# Altium PCB comms temp.PcbDoc
Units mil, origin at the board's own origin, x right, y up, seen from the top; angles counter-clockwise.
Board outline 6000 x 4000 mil, 2 copper layers (Top Layer, Bottom Layer); 104 components, 658 nets, 470 pads, 0 vias.
Unrouted connection lines stored in the file: 208.
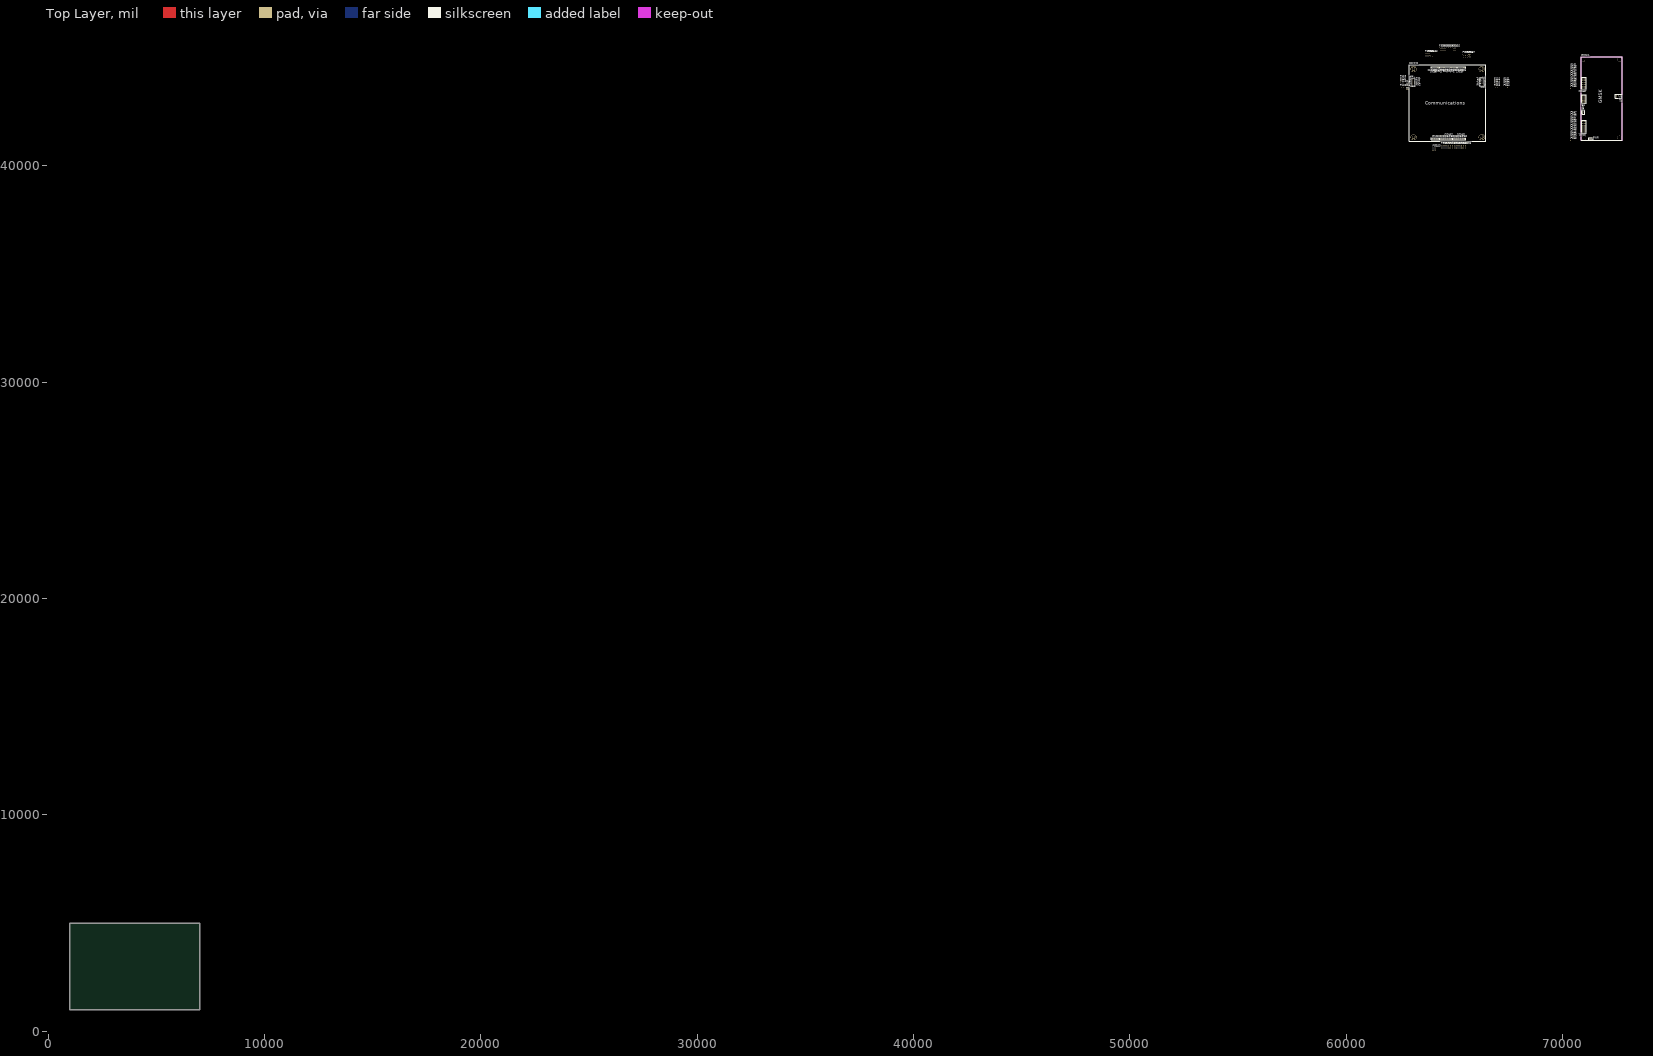
[diagram p0: Top Layer view]
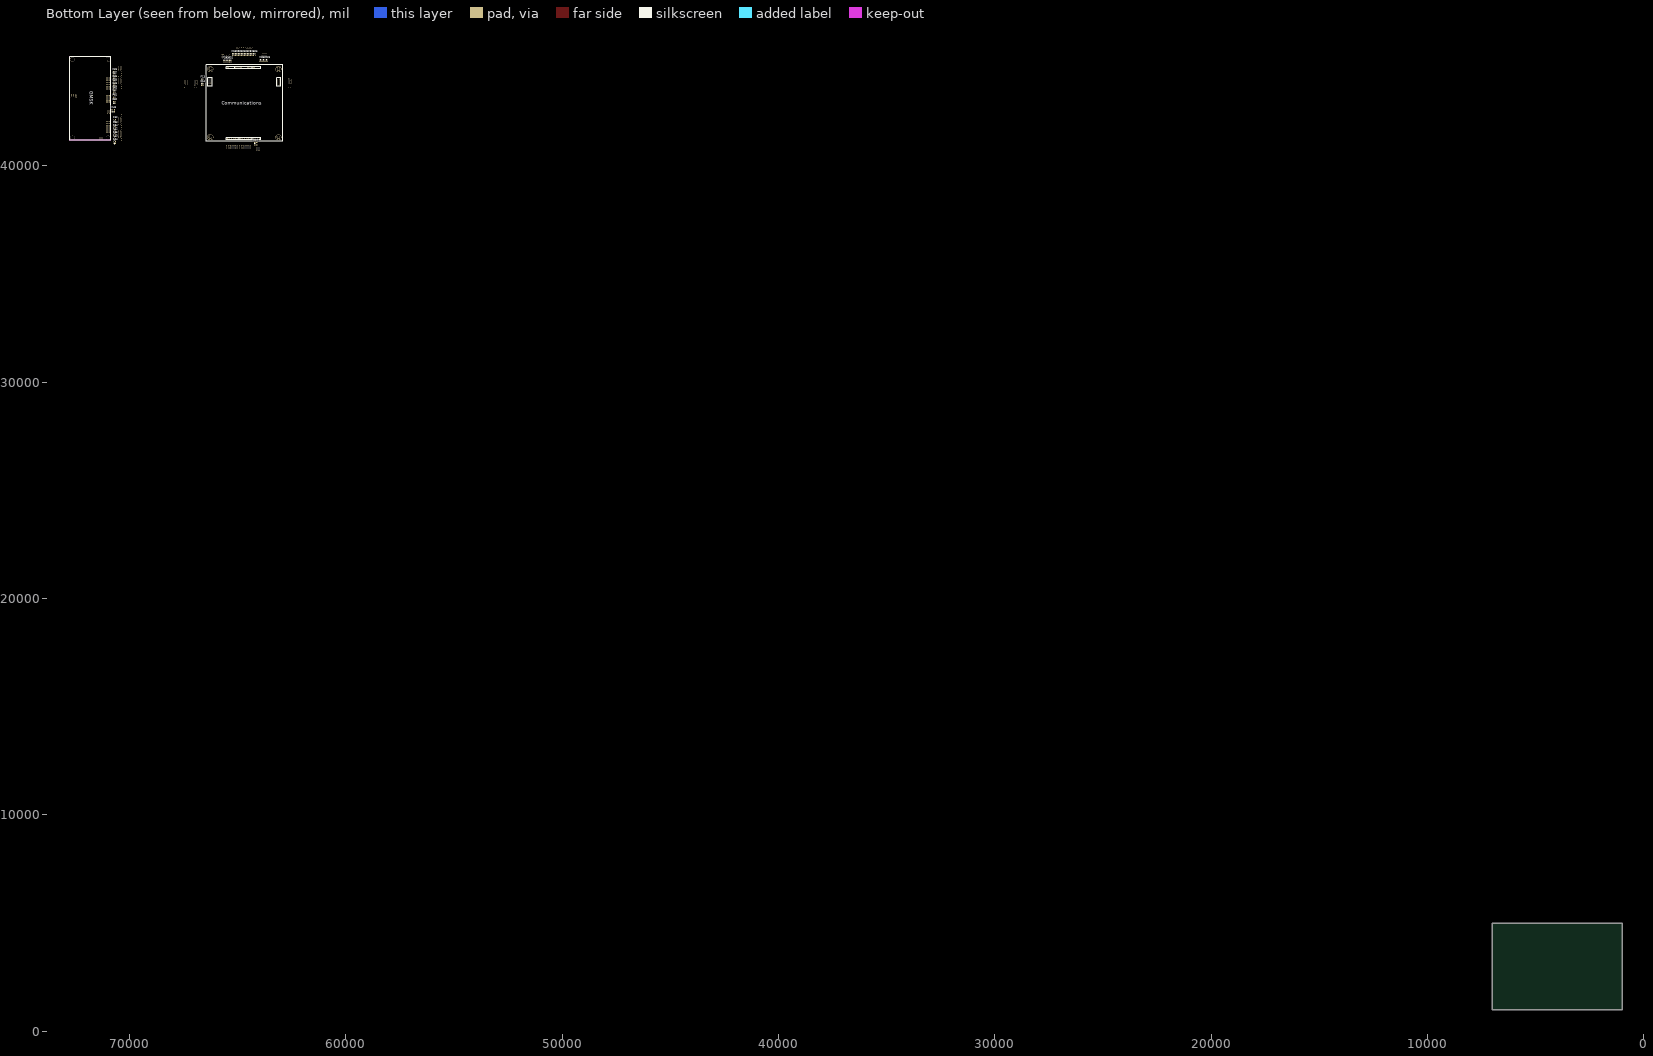
[diagram p1: Bottom Layer view, seen from below]

## Layer stack, top to bottom
Top Layer: signal copper 1.4
Dielectric: dielectric 12.6, FR-4, Dk 4.8
Bottom Layer: signal copper 1.4

## Board outline
1000,1000 7000,1000 7000,5000 1000,5000

## Design rules (kind name [scope] priority, off if disabled: settings)
Clearance [All] p1: gap=10
PolygonConnect [All] p1: connectstyle=Relief reliefconductorwidth=10 reliefentries=4 polygonreliefangle="90 Angle"
RoomDefinition COMMS [InComponentClass('COMMS')] p1: confinementstyle=ConfineIn formatcopy=TRUE lockcomponents=FALSE outline 3860,5170 35820,5170 35820,24895 3860,24895
RoutingVias [All] p1: holewidth=28 width=50 viastyle="Through Hole" minholewidth=28 minwidth=50 maxholewidth=28 maxwidth=50
SilkscreenOverComponentPads [All] p1: minsilkscreentomaskgap=10
SolderMaskExpansion [All] p1: expansion=4
Width [All] p1: maxlimit=10 minlimit=10 preferedwidth=10
27 further rules are at their usual default settings.

## Classes and differential pairs
component class CONNECTORS: F49 F50 F51 F52 F53 F54 F55 F56 F57 F58 F59 F60 F61 F62 J1 J2 J3 J4 J5 J6 J7 J8 J9 J10 J11 J12 J13 J14 J15 J16 J17 J18 J19 J20 J21 J22 J23 J24 P169 P170 P171 P172 P173 P174 P175 P176 P177 P178 P179 P180 P181 P182 P183 P184 P185 P186
component class PWR_GEN: BCR1 D1 F86 F87 F88 F89 F90 F91 F92 F93 F94 F95 F96 F97 F98 F99 F100 F101 F102 F103 F104 F105 P321 P322 P323 P324 P325 P326 P327 P328 P329 P330 P331 P332 P333 P334 P335 P336 P337 P338 P339 P340 P341 P342 P343 P344 P345 P346 P347 P348 P349 P350 P351 P352 P353 P354 P355
component class PWR_REG: F106 F107 F108 F109 F110 F111 F112 F113 F114 F115 F116 F117 F118 F119 F120 F121 F122 F123 F124 F125 F126 F127 J25 J26 J27 J28 J29 J30 J31 J32 LDO1 LDO2 P356 P357 P358 P359 P360 P361 P362 P363 P364 P365 P366 P367 P368 P369 P370 P371 P372 P373 P374 P375 P376 P377 P378 P379 P380 P381 P382 P383 P384 P385 P386 P387 P388 P389 P390 P391 P392 P393 P394 P395 P396 P397 P398 P399 P400 P401 P402 P403 P404 P405 P406 P407 P408 P409 P410 P411 SW1 SW2 TRX1 TRX2

## Components (designator, comment, footprint, x,y, rotation, side; value= is the part's Value field where it differs from the comment)
COMMS "COMMS" Communications 62920,41125 r0 top
F13 "Filter" Filter 66640,43925 r180 bottom
F14 "Filter" Filter 66640,43725 r180 bottom
F15 "Filter" Filter 62820,43725 r0 top
F16 "Filter" Filter 62820,43525 r0 top
F17 "FilterPwr" FILTERPWR 64120,41025 r90 bottom
F18 "Filter" Filter 65210,45110 r180 bottom
F19 "Filter" Filter 65070,45110 r180 bottom
F20 "Filter" Filter 64930,45110 r180 bottom
F21 "Filter" Filter 64790,45110 r180 bottom
F22 "Filter" Filter 64650,45110 r180 bottom
F23 "Filter" Filter 64510,45110 r180 bottom
F24 "Filter" Filter 64370,45110 r180 bottom
F25 "Filter" Filter 64230,45110 r180 bottom
F26 "Filter" Filter 63930,44820 r180 bottom
F27 "Filter" Filter 63790,44820 r180 bottom
F28 "Filter" Filter 63650,44820 r180 bottom
F29 "Filter" Filter 65630,44805 r180 bottom
F30 "Filter" Filter 65490,44805 r180 bottom
F31 "Filter" Filter 65350,44805 r180 bottom
F32 "Filter" Filter 70690,42130 r0 bottom
F33 "Filter" Filter 70690,41910 r0 bottom
F34 "Filter" Filter 70690,41750 r0 bottom
F35 "Filter" Filter 70690,41430 r0 bottom
F36 "Filter" Filter 70710,44350 r0 bottom
F37 "Filter" Filter 70710,44190 r0 bottom
F38 "Filter" Filter 70710,43870 r0 bottom
F39 "Filter" Filter 70710,43550 r0 bottom
F40 "Filter" Filter 70710,42970 r0 bottom
F41 "Filter" Filter 70710,43170 r0 bottom
F42 "Filter" Filter 70690,41590 r0 bottom
F43 "Filter" Filter 70690,41270 r0 bottom
F44 "Filter" Filter 70690,41110 r0 bottom
F45 "Filter" Filter 70710,44030 r0 bottom
F46 "Filter" Filter 70710,43710 r0 bottom
F47 "Filter" Filter 70710,43390 r0 bottom
F48 "FilterPwr" FILTERPWR 70750,42590 r0 bottom
GMSK1 "GMSK" GMSK 72795,41180 r90 top
P103 "Jumper" Jumper 65020,40825 r90 top
P104 "Jumper" Jumper 65120,40825 r90 top
P105 "Jumper" Jumper 65220,40825 r90 top
P106 "Jumper" Jumper 65320,40825 r90 top
P107 "Jumper" Jumper 65420,40925 r270 top
P108 "Jumper" Jumper 65520,40825 r90 top
P109 "Jumper" Jumper 64420,40825 r90 top
P110 "Jumper" Jumper 64520,40825 r90 top
P111 "Jumper" Jumper 64620,40825 r90 top
P112 "Jumper" Jumper 64720,40825 r90 top
P113 "Jumper" Jumper 64820,40825 r90 top
P114 "Jumper" Jumper 64920,40825 r90 top
P115 "Jumper" Jumper 66965,43925 r180 top
P116 "Jumper" Jumper 66965,43725 r180 top
P117 "Jumper" Jumper 66965,43825 r180 top
P118 "Jumper" Jumper 66965,43625 r180 top
P119 "Jumper" Jumper 62520,44025 r0 top
P120 "Jumper" Jumper 62520,43925 r0 top
P121 "Jumper" Jumper 62520,43825 r0 top
P122 "Jumper" Jumper 62520,43625 r0 top
P123 "Jumper" Jumper 64120,40725 r90 top
P124 "Jumper" Jumper 64020,40725 r90 top
P125 "Jumper" Jumper 65030,45330 r90 top
P126 "Jumper" Jumper 64930,45330 r90 top
P127 "Jumper" Jumper 64830,45330 r90 top
P128 "Jumper" Jumper 64730,45330 r90 top
P129 "Jumper" Jumper 64630,45330 r90 top
P130 "Jumper" Jumper 64530,45330 r90 top
P131 "Jumper" Jumper 64430,45330 r90 top
P132 "Jumper" Jumper 64330,45330 r90 top
P133 "Jumper" Jumper 63990,45090 r90 top
P134 "Jumper" Jumper 63890,45090 r90 top
P135 "Jumper" Jumper 63790,45090 r90 top
P136 "Jumper" Jumper 63690,45090 r90 top
P137 "Jumper" Jumper 65720,45040 r90 top
P138 "Jumper" Jumper 65620,45040 r90 top
P139 "Jumper" Jumper 65520,45040 r90 top
P140 "Jumper" Jumper 65420,45040 r90 top
P141 "Jumper" Jumper 70410,42070 r0 top
P142 "Jumper" Jumper 70410,41870 r0 top
P143 "Jumper" Jumper 70410,41770 r0 top
P144 "Jumper" Jumper 70410,41670 r0 top
P145 "Jumper" Jumper 70410,41470 r0 top
P146 "Jumper" Jumper 70410,44470 r0 top
P147 "Jumper" Jumper 70410,44270 r0 top
P148 "Jumper" Jumper 70410,44070 r0 top
P149 "Jumper" Jumper 70410,43870 r0 top
P150 "Jumper" Jumper 70410,43670 r0 top
P151 "Jumper" Jumper 67320,43925 r0 top
P152 "Jumper" Jumper 67320,43825 r0 top
P153 "Jumper" Jumper 67320,43725 r0 top
P154 "Jumper" Jumper 67320,43625 r0 top
P155 "Jumper" Jumper 70510,42270 r180 top
P156 "Jumper" Jumper 70510,41970 r180 top
P157 "Jumper" Jumper 70510,42170 r180 top
P158 "Jumper" Jumper 70510,41570 r180 top
P159 "Jumper" Jumper 70510,41370 r180 top
P160 "Jumper" Jumper 70510,41270 r180 top
P161 "Jumper" Jumper 70510,44570 r180 top
P162 "Jumper" Jumper 70510,44370 r180 top
P163 "Jumper" Jumper 70510,44170 r180 top
P164 "Jumper" Jumper 70510,43970 r180 top
P165 "Jumper" Jumper 70510,43770 r180 top
P166 "Jumper" Jumper 70510,43570 r180 top
P167 "Jumper" Jumper 70510,42370 r180 top
P168 "Jumper" Jumper 70410,41170 r0 top

## Footprints (in the part's own frame and the unit in brackets; to place one, negate y for a bottom-side part, rotate by r counter-clockwise, add the part's x,y. Pads: shape width x height; smd on the part's side, far side on the other; paste and mask are expansions set on the pad)
Communications [mm] "Communications"
  round 1.5 hole 0.9: AFSK1_M0(32.192,86.733) AFSK1_M1(29.652,86.733) AFSK1_RXD(34.732,86.733) AFSK2_M0(62.672,86.733) AFSK2_M1(60.132,86.733) AFSK2_RXD(65.212,86.733) AFSK2_TXD(57.592,86.733) DTMF1_Q1(52.512,3.113) DTMF1_Q2(55.052,3.113) DTMF1_Q3(57.592,3.113) DTMF1_Q4(60.132,3.113) DTMF1_ST(62.672,3.113) DTMF2_ES(49.972,3.113) DTMF2_Q1(37.272,3.113) DTMF2_Q2(39.812,3.113) DTMF2_Q3(42.352,3.113) DTMF2_Q4(44.892,3.113) DTMF2_ST(47.432,3.113) GMSK_RX1(83.952,70.923) GMSK_RX2(83.952,65.843) GMSK_TX2(83.952,68.383) GND(3.462,66.013) GND(3.462,68.553) GND(3.462,71.093) GND(3.462,73.633) GND(27.112,3.113) GND(29.652,3.113) GND(86.492,65.843) GND(86.492,68.383) GND(86.492,70.923) GND(86.492,73.463) RX1(6.002,68.553) S0(55.052,86.733) S1(52.512,86.733) S2(49.972,86.733) S3(47.432,86.733) S4(44.892,86.733) S5(42.352,86.733) S6(39.812,86.733) S7(37.272,86.733) TX1(6.002,73.633) TX2(6.002,71.093) VCC(32.192,3.113) VCC(34.732,3.113)
  rect 1.5x1.5 hole 0.9: AFSK1_TXD(27.112,86.733) DTMF1_ES(65.212,3.113) GMSK_TX1(83.952,73.463) RX2(6.002,66.013)
  round 1 hole 0.3: GND(2.377,5.013) GND(2.377,85.013) GND(2.729,3.701) GND(2.729,6.325) GND(2.729,83.701) GND(2.729,86.325) GND(3.69,7.286) GND(3.69,87.286) GND(3.69,2.74) GND(3.69,82.74) GND(5.002,2.388) GND(5.002,7.638) GND(5.002,82.388) GND(5.002,87.638) GND(6.314,2.74) GND(6.314,7.286) GND(6.314,82.74) GND(6.314,87.286) GND(7.275,3.701) GND(7.275,83.701) GND(7.275,6.325) GND(7.275,86.325) GND(7.627,5.013) GND(7.627,85.013) GND(82.375,85) GND(82.377,5.013) GND(82.727,83.688) GND(82.727,86.312) GND(82.729,3.701) GND(82.729,6.325) GND(83.688,87.273) GND(83.688,82.727) GND(83.69,7.286) GND(83.69,2.74) GND(85,82.375) GND(85,87.625) GND(85.002,2.388) GND(85.002,7.638) GND(86.312,82.727) GND(86.312,87.273) GND(86.314,2.74) GND(86.314,7.286) GND(87.273,83.688) GND(87.273,86.312) GND(87.275,3.701) GND(87.275,6.325) GND(87.625,85) GND(87.627,5.013)
  round 7 hole 3.5: GND(5.002,5.013) GND(5.002,85.013) GND(85,85) GND(85.002,5.013)
  silkscreen extent 0,0.01 90,90.01
Filter [mm]
  rect 1x1.4 smd: 1(-1,2) 2(1,0) 2(1,2) 3(-1,0)
  silkscreen extent 0,1.35 0,2.65, body extent -1.1,-0.65 1.1,2.65, height 0.5
FILTERPWR [mm]
  rect 1.15x1.7 smd: 1(-1.425,2.35) 2(1.425,0) 2(1.425,2.35) 3(-1.425,0)
  silkscreen extent 0,1.7 0,3, body extent -1.63,-0.82 1.62,3.17, height 0.7
GMSK [mm] "Foot print of GMSK for the flatsat board"
  rect 1.5x2.1 hole 1: 1A(22.15,47.03) 1B(73.05,47.08) 1C(44.59,44.54) 2C(31.77,46.29)
  rect 2.1x1.5 hole 1: 1C(50.53,7.82) 8C(1.97,36.2)
  oval 1.5x2.1 hole 1: 2A(22.15,44.49) 2B(73.05,44.54) 3A(19.61,47.03) 3B(70.51,47.08) 3C(47.13,44.54) 4A(19.61,44.49) 4B(70.51,44.54) 5A(17.07,47.03) 5B(67.97,47.08) 5C(49.67,44.54) 6A(17.07,44.49) 6B(67.97,44.54) 7A(14.53,47.03) 7B(65.43,47.08) 7C(52.21,44.54) 8A(14.53,44.49) 8B(65.43,44.54) 8C(44.59,47.08) 8C(47.13,47.08) 8C(49.67,47.08) 8C(52.21,47.08) 8C(60.35,47.08) 9A(11.99,47.03) 9B(62.89,47.08) 10A(11.99,44.49) 10B(62.89,44.54) 11A(9.45,47.03) 12A(9.45,44.49) 12B(60.35,44.54) ""(34.31,46.29)
  oval 2.1x1.5 hole 1: 2C(1.97,38.74) 3(50.53,5.28) 3C(50.53,2.74) 4(53.07,5.28) 5C(53.07,2.74) 7C(53.07,7.82)
  round 5 hole 3: 8C(2.97,45.74) 8C(3,4) 8C(94.97,3.74) 8C(94.97,45.74)
  round 1 hole 0.3: GND(0.97,45.74) GND(1,4) GND(1.238,46.74) GND(1.238,44.74) GND(1.268,5) GND(1.268,3) GND(1.97,47.472) GND(1.97,44.008) GND(2,5.732) GND(2,2.268) GND(2.97,47.74) GND(2.97,43.74) GND(3,6) GND(3,2) GND(3.97,44.008) GND(3.97,47.472) GND(4,2.268) GND(4,5.732) GND(4.702,44.74) GND(4.702,46.74) GND(4.732,3) GND(4.732,5) GND(4.97,45.74) GND(5,4) GND(92.97,3.74) GND(92.97,45.74) GND(93.238,2.74) GND(93.238,4.74) GND(93.238,44.74) GND(93.238,46.74) GND(93.97,2.008) GND(93.97,5.472) GND(93.97,44.008) GND(93.97,47.472) GND(94.97,1.74) GND(94.97,5.74) GND(94.97,43.74) GND(94.97,47.74) GND(95.97,2.008) GND(95.97,5.472) GND(95.97,44.008) GND(95.97,47.472) GND(96.702,2.74) GND(96.702,4.74) GND(96.702,44.74) GND(96.702,46.74) GND(96.97,3.74) GND(96.97,45.74)
  Top Layer lines w0.3: 50.53,2.74 50.03,2.24
  Keep-Out Layer lines w0.254: -0.03,48.74 97.97,48.74 97.97,0.74 -0.03,0.74 -0.03,48.74
  silkscreen extent -0.03,0.74 97.97,48.94, body extent 0.8,1.57 74.23,48.26, height 7.01
Jumper [mm] "Connector; Header; 2 Position"
  round 1.5 hole 0.9: 1(0,0) 2(2.54,0)

## Nets (pads, with @x,y where several pads share a name; then routed paths per layer and width w, separated by ;. In a path a pad name is that pad's centre, name@x,y a point inside that pad or via, vN(x,y) a via of type N, cw(c..) or ccw(c..) an arc to the next point about the centre after c; other vN are vias at no path point)
3V3_AUX: 
3V3_AUX_E\N\: 
3V3_BBONE: 
3V3_COMMS: P123.1 P167.2
3V3_CSC: 
3V3_PWR: 
3V3_UNREG: 
5V0_AUX: 
5V0_AUX_E\N\: 
5V0_BBONE: 
5V0_BCR: 
5V0_TELEM: 
5V0_UNREG: 
8V0_RX1: 
8V0_RX2: 
AFSK1_DET: P108.1
AFSK1_M0: P134.2
AFSK1_M1: P135.2
AFSK1_RX: 
AFSK1_RXD: P133.2
AFSK1_TX: 
AFSK1_TXD: P136.2
AFSK2_DET: P114.1
AFSK2_M0: P138.2
AFSK2_M1: P139.2
AFSK2_RX: 
AFSK2_RXD: P137.2
AFSK2_TX: 
AFSK2_TXD: P140.2
BBONE_E\N\: 
BBONE_I2C2_SCL: 
BBONE_I2C2_SDA: 
BCR_E\N\: 
BCR_MISO: 
BCR_MOSI: 
BCR_R\S\T\: 
BCR_SCK: 
COMMS_E\N\: 
CSC_E\N\: 
CSC_ISP: 
CSC_RST: 
DTMF1Q1: P103.1
DTMF1Q2: P104.1
DTMF1Q3: P105.1
DTMF1Q4: P106.1
DTMF1ST: P107.1
DTMF2Q1: P109.1
DTMF2Q2: P110.1
DTMF2Q3: P111.1
DTMF2Q4: P112.1
DTMF2ST: P113.1
GND: F13.3 F14.3 F15.3 F16.3 F17.3 F18.3 F19.3 F20.3 F21.3 F22.3 F23.3 F24.3 F25.3 F26.3 F27.3 F28.3 F29.3 F30.3 F31.3 F32.3 F33.3 F34.3 F35.3 F36.3 F37.3 F38.3 F39.3 F40.3 F41.3 F42.3 F43.3 F44.3 F45.3 F46.3 F47.3 F48.3 P124.1 P168.2
I2C0_SCL: 
I2C0_SDA: 
I2C1_SCL: 
I2C1_SDA: 
I2C2_SCL: 
I2C2_SCL_5V: 
I2C2_SDA: 
I2C2_SDA_5V: 
NetBBONE1_A01: 
NetBBONE1_A02: 
NetBBONE1_A03: 
NetBBONE1_A04: 
NetBBONE1_A05: 
NetBBONE1_A06: 
NetBBONE1_A07: 
NetBBONE1_A08: 
NetBBONE1_A09: 
NetBBONE1_A10: 
NetBBONE1_A11: 
NetBBONE1_A12: 
NetBBONE1_A13: 
NetBBONE1_A14: 
NetBBONE1_A15: 
NetBBONE1_A16: 
NetBBONE1_A17: 
NetBBONE1_A18: 
NetBBONE1_A19: 
NetBBONE1_A20: 
NetBBONE1_A21: 
NetBBONE1_A22: 
NetBBONE1_A23: 
NetBBONE1_A24: 
NetBBONE1_A25: 
NetBBONE1_A26: 
NetBBONE1_A27: 
NetBBONE1_A28: 
NetBBONE1_A29: 
NetBBONE1_A30: 
NetBBONE1_A31: 
NetBBONE1_A32: 
NetBBONE1_A33: 
NetBBONE1_A34: 
NetBBONE1_A35: 
NetBBONE1_A36: 
NetBBONE1_A37: 
NetBBONE1_A38: 
NetBBONE1_A39: 
NetBBONE1_A40: 
NetBBONE1_A41: 
NetBBONE1_A42: 
NetBBONE1_A43: 
NetBBONE1_A44: 
NetBBONE1_A45: 
NetBBONE1_A46: 
NetBBONE1_B01: 
NetBBONE1_B02: 
NetBBONE1_B03: 
NetBBONE1_B04: 
NetBBONE1_B05: 
NetBBONE1_B06: 
NetBBONE1_B07: 
NetBBONE1_B08: 
NetBBONE1_B09: 
NetBBONE1_B10: 
NetBBONE1_B11: 
NetBBONE1_B12: 
NetBBONE1_B13: 
NetBBONE1_B14: 
NetBBONE1_B15: 
NetBBONE1_B16: 
NetBBONE1_B17: 
NetBBONE1_B18: 
NetBBONE1_B19: 
NetBBONE1_B20: 
NetBBONE1_B21: 
NetBBONE1_B22: 
NetBBONE1_B23: 
NetBBONE1_B24: 
NetBBONE1_B25: 
NetBBONE1_B26: 
NetBBONE1_B27: 
NetBBONE1_B28: 
NetBBONE1_B29: 
NetBBONE1_B30: 
NetBBONE1_B31: 
NetBBONE1_B32: 
NetBBONE1_B33: 
NetBBONE1_B34: 
NetBBONE1_B35: 
NetBBONE1_B36: 
NetBBONE1_B37: 
NetBBONE1_B38: 
NetBBONE1_B39: 
NetBBONE1_B40: 
NetBBONE1_B41: 
NetBBONE1_B42: 
NetBBONE1_B43: 
NetBBONE1_B44: 
NetBBONE1_B45: 
NetBBONE1_B46: 
NetBBONE1_P01: 
NetBBONE1_P02: 
NetBBONE1_P03: 
NetBBONE1_P04: 
NetBBONE1_P05: 
NetBBONE1_P06: 
NetBBONE1_P07: 
NetBBONE1_P08: 
NetBBONE1_P09: 
NetBBONE1_P10: 
NetBCR1_1: 
NetBCR1_2: 
NetBCR1_3: 
NetBCR1_4: 
NetBCR1_5: 
NetBCR1_6: 
NetBCR1_7: 
NetBCR1_8: 
NetBCR1_9: 
NetBCR1_10: 
NetBCR1_11: 
NetBCR1_12: 
NetBCR1_13: 
NetBCR1_14: 
NetBCR1_15: 
NetBCR1_16: 
NetBCR1_17: 
NetBCR1_18: 
NetBCR1_19: 
NetBCR1_20: 
NetBCR1_21: 
NetBCR1_22: 
NetBCR1_23: 
NetBCR1_24: 
NetBCR1_25: 
NetBCR1_26: 
NetBCR1_27: 
NetBCR1_28: 
NetBCR1_29: 
NetBCR1_30: 
NetBCR1_31: 
NetBCR1_32: 
NetBCR1_33: 
NetBCR1_34: 
NetBCR1_35: 
NetC1_2: 
NetCOMMS_AFSK1_M0: COMMS.AFSK1_M0 F26.2
NetCOMMS_AFSK1_M1: COMMS.AFSK1_M1 F27.2
NetCOMMS_AFSK1_RXD: COMMS.AFSK1_RXD P133.1
NetCOMMS_AFSK1_TXD: COMMS.AFSK1_TXD F28.2
NetCOMMS_AFSK2_M0: COMMS.AFSK2_M0 F29.2
NetCOMMS_AFSK2_M1: COMMS.AFSK2_M1 F30.2
NetCOMMS_AFSK2_RXD: COMMS.AFSK2_RXD P137.1
NetCOMMS_AFSK2_TXD: COMMS.AFSK2_TXD F31.2
NetCOMMS_DTMF1_ES: COMMS.DTMF1_ES P108.2
NetCOMMS_DTMF1_Q1: COMMS.DTMF1_Q1 P103.2
NetCOMMS_DTMF1_Q2: COMMS.DTMF1_Q2 P104.2
NetCOMMS_DTMF1_Q3: COMMS.DTMF1_Q3 P105.2
NetCOMMS_DTMF1_Q4: COMMS.DTMF1_Q4 P106.2
NetCOMMS_DTMF1_ST: COMMS.DTMF1_ST P107.2
NetCOMMS_DTMF2_ES: COMMS.DTMF2_ES P114.2
NetCOMMS_DTMF2_Q1: COMMS.DTMF2_Q1 P109.2
NetCOMMS_DTMF2_Q2: COMMS.DTMF2_Q2 P110.2
NetCOMMS_DTMF2_Q3: COMMS.DTMF2_Q3 P111.2
NetCOMMS_DTMF2_Q4: COMMS.DTMF2_Q4 P112.2
NetCOMMS_DTMF2_ST: COMMS.DTMF2_ST P113.2
NetCOMMS_GMSK_RX1: COMMS.GMSK_RX1 P117.2
NetCOMMS_GMSK_RX2: COMMS.GMSK_RX2 P118.2
NetCOMMS_GMSK_TX1: COMMS.GMSK_TX1 F13.2
NetCOMMS_GMSK_TX2: COMMS.GMSK_TX2 F14.2
NetCOMMS_GND: COMMS.GND P124.2
NetCOMMS_RX1: COMMS.RX1 F15.2
NetCOMMS_RX2: COMMS.RX2 F16.2
NetCOMMS_S0: COMMS.S0 F18.2
NetCOMMS_S1: COMMS.S1 F19.2
NetCOMMS_S2: COMMS.S2 F20.2
NetCOMMS_S3: COMMS.S3 F21.2
NetCOMMS_S4: COMMS.S4 F22.2
NetCOMMS_S5: COMMS.S5 F23.2
NetCOMMS_S6: COMMS.S6 F24.2
NetCOMMS_S7: COMMS.S7 F25.2
NetCOMMS_TX1: COMMS.TX1 P119.2
NetCOMMS_TX2: COMMS.TX2 P120.2
NetCOMMS_VCC: COMMS.VCC F17.2
NetCSC1_C1_1: 
NetCSC1_C1_2: 
NetCSC1_C1_3: 
NetCSC1_C1_4: 
NetCSC1_C1_5: 
NetCSC1_C1_6: 
NetCSC1_C1_7: 
NetCSC1_C1_8: 
NetCSC1_C1_9: 
NetCSC1_C1_10: 
NetCSC1_C1_11: 
NetCSC1_C1_12: 
NetCSC1_C1_13: 
NetCSC1_C1_14: 
NetCSC1_C1_15: 
NetCSC1_C1_16: 
NetCSC1_C1_17: 
NetCSC1_C1_18: 
NetCSC1_C1_19: 
NetCSC1_C1_20: 
NetCSC1_C1_21: 
NetCSC1_C1_22: 
NetCSC1_C1_23: 
NetCSC1_C1_24: 
NetCSC1_C1_25: 
NetCSC1_C1_26: 
NetCSC1_C1_27: 
NetCSC1_C1_28: 
NetCSC1_C1_29: 
NetCSC1_C1_30: 
NetCSC1_C1_31: 
NetCSC1_C1_32: 
NetCSC1_C1_33: 
NetCSC1_C1_34: 
NetCSC1_C1_35: 
NetCSC1_C1_36: 
NetCSC1_C1_37: 
NetCSC1_C1_38: 
NetCSC1_C1_39: 
NetCSC1_C1_40: 
NetCSC1_C2_1: 
NetCSC1_C2_2: 
NetCSC1_C2_3: 
NetCSC1_C2_4: 
NetCSC1_C2_5: 
NetCSC1_C2_6: 
NetCSC1_C2_7: 
NetCSC1_C2_8: 
NetCSC1_C2_9: 
NetCSC1_C2_10: 
NetCSC1_C2_11: 
NetCSC1_C2_12: 
NetCSC1_C2_13: 
NetCSC1_C2_14: 
NetCSC1_C2_15: 
NetCSC1_C2_16: 
NetCSC1_C2_17: 
NetCSC1_C2_18: 
NetCSC1_C2_19: 
NetCSC1_C2_20: 
NetCSC1_C2_21: 
NetCSC1_C2_22: 
NetCSC1_C2_23: 
NetCSC1_C2_24: 
NetCSC1_C2_25: 
NetCSC1_C2_26: 
NetCSC1_C2_27: 
NetCSC1_C2_28: 
NetCSC1_C2_29: 
NetCSC1_C2_30: 
NetCSC1_C2_31: 
NetCSC1_C2_32: 
NetCSC1_C2_33: 
NetCSC1_C2_34: 
NetCSC1_C2_35: 
NetCSC1_C2_36: 
NetCSC1_C2_37: 
NetCSC1_C2_38: 
NetCSC1_C2_39: 
NetCSC1_C2_40: 
NetCSC1_C3_1: 
NetCSC1_C3_2: 
NetCSC1_C3_3: 
NetCSC1_C3_4: 
NetCSC1_C3_5: 
NetCSC1_C3_6: 
NetCSC1_C3_7: 
NetCSC1_C3_8: 
NetCSC1_C3_9: 
NetCSC1_C3_10: 
NetCSC1_C3_11: 
NetCSC1_C3_12: 
NetCSC1_C3_13: 
NetCSC1_C3_14: 
NetCSC1_C3_15: 
NetCSC1_C3_16: 
NetCSC1_C3_17: 
NetCSC1_C3_18: 
NetCSC1_C3_19: 
NetCSC1_C3_20: 
NetCSC1_C3_21: 
NetCSC1_C3_22: 
NetCSC1_C3_23: 
NetCSC1_C3_24: 
NetCSC1_C3_25: 
NetCSC1_C3_26: 
NetCSC1_C3_27: 
NetCSC1_C3_28: 
NetCSC1_C3_29: 
NetCSC1_C3_30: 
NetCSC1_C3_31: 
NetCSC1_C3_32: 
NetCSC1_C3_33: 
NetCSC1_C3_34: 
NetCSC1_C3_35: 
NetCSC1_C3_36: 
NetCSC1_C3_37: 
NetCSC1_C3_38: 
NetCSC1_C3_39: 
NetCSC1_C3_40: 
NetCSC1_GND: 
NetCSC1_ISP1: 
NetCSC1_ISP2: 
NetCSC1_ISP3: 
NetCSC1_ISP4: 
NetCSC1_ISP5: 
NetCSC1_ISP6: 
NetD1_1: 
NetF1_1: 
NetF2_1: 
NetF3_1: 
NetF4_1: 
NetF5_1: 
NetF6_1: 
NetF7_1: 
NetF8_1: 
NetF9_1: 
NetF10_1: 
NetF11_2: 
NetF12_2: 
NetF13_1: F13.1 P115.2
NetF14_1: F14.1 P116.2
NetF15_1: F15.1 P121.2
NetF16_1: F16.1 P122.2
NetF17_1: F17.1 P123.2
NetF18_1: F18.1 P125.1
NetF19_1: F19.1 P126.1
NetF20_1: F20.1 P127.1
NetF21_1: F21.1 P128.1
NetF22_1: F22.1 P129.1
NetF23_1: F23.1 P130.1
NetF24_1: F24.1 P131.1
NetF25_1: F25.1 P132.1
NetF26_1: F26.1 P134.1
NetF27_1: F27.1 P135.1
NetF28_1: F28.1 P136.1
NetF29_1: F29.1 P138.1
NetF30_1: F30.1 P139.1
NetF31_1: F31.1 P140.1
NetF32_1: F32.1 P141.2
NetF32_2: F32.2 GMSK1.1A
NetF33_1: F33.1 P143.2
NetF33_2: F33.2 GMSK1.5A
NetF34_1: F34.1 P144.2
NetF34_2: F34.2 GMSK1.7A
NetF35_1: F35.1 P145.2
NetF35_2: F35.2 GMSK1.9A
NetF36_1: F36.1 P146.2
NetF36_2: F36.2 GMSK1.1B
NetF37_1: F37.1 P148.2
NetF37_2: F37.2 GMSK1.5B
NetF38_1: F38.1 P149.2
NetF38_2: F38.2 GMSK1.7B
NetF39_1: F39.1 P150.2
NetF39_2: F39.2 GMSK1.9B
NetF40_1: F40.1 P152.2
NetF40_2: F40.2 GMSK1.3C
NetF41_1: F41.1 P154.2
NetF41_2: F41.2 GMSK1.7C
NetF42_1: F42.1 P158.1
NetF42_2: F42.2 GMSK1.8A
NetF43_1: F43.1 P159.1
NetF43_2: F43.2 GMSK1.10A
NetF44_1: F44.1 P160.1
NetF44_2: F44.2 GMSK1.12A
NetF45_1: F45.1 P164.1
NetF45_2: F45.2 GMSK1.8B
NetF46_1: F46.1 P165.1
NetF46_2: F46.2 GMSK1.10B
NetF47_1: F47.1 P166.1
NetF47_2: F47.2 GMSK1.12B
NetF48_1: F48.1 P167.1
NetF48_2: F48.2 GMSK1.2C
NetF50_2: 
NetF51_2: 
NetF52_2: 
NetF53_2: 
NetF54_2: 
NetF55_2: 
NetF56_2: 
NetF57_2: 
NetF58_2: 
NetF59_1: 
NetF60_1: 
NetF61_2: 
NetF62_2: 
NetF63_1: 
NetF64_1: 
NetF65_1: 
NetF66_1: 
NetF67_1: 
NetF68_1: 
NetF69_1: 
NetF70_1: 
NetF71_1: 
NetF72_1: 
NetF73_1: 
NetF74_1: 
NetF75_1: 
NetF76_1: 
NetF77_1: 
NetF78_1: 
NetF79_1: 
NetF80_1: 
NetF81_1: 
NetF82_1: 
NetF83_1: 
NetF84_1: 
NetF84_2: 
NetF85_1: 
NetF86_1: 
NetF87_1: 
NetF88_1: 
NetF89_1: 
NetF90_1: 
NetF91_1: 
NetF92_1: 
NetF93_1: 
NetF94_1: 
NetF95_1: 
NetF96_1: 
NetF97_1: 
NetF98_1: 
NetF99_2: 
NetF100_1: 
NetF101_1: 
NetF102_1: 
NetF103_1: 
NetF104_1: 
NetF105_1: 
NetF106_1: 
NetF106_2: 
NetF107_1: 
NetF107_2: 
NetF108_1: 
NetF108_2: 
NetF109_1: 
NetF109_2: 
NetF110_1: 
NetF110_2: 
NetF111_1: 
NetF111_2: 
NetF112_1: 
NetF112_2: 
NetF113_1: 
NetF113_2: 
NetF114_1: 
NetF114_2: 
NetF115_1: 
NetF115_2: 
NetF116_1: 
NetF116_2: 
NetF117_1: 
NetF117_2: 
NetF118_1: 
NetF118_2: 
NetF119_1: 
NetF119_2: 
NetF120_1: 
NetF120_2: 
NetF121_1: 
NetF121_2: 
NetF122_1: 
NetF122_2: 
NetF123_1: 
NetF123_2: 
NetF124_1: 
NetF124_2: 
NetF125_1: 
NetF125_2: 
NetF126_1: 
NetF126_2: 
NetF127_1: 
NetF127_2: 
NetGMSK1_1C: GMSK1.1C P151.2
NetGMSK1_2A: GMSK1.2A P155.1
NetGMSK1_2B: GMSK1.2B P161.1
NetGMSK1_3A: GMSK1.3A P142.2
NetGMSK1_3B: GMSK1.3B P147.2
NetGMSK1_4A: GMSK1.4A P156.1
NetGMSK1_4B: GMSK1.4B P162.1
NetGMSK1_5C: GMSK1.5C P153.2
NetGMSK1_6A: GMSK1.6A P157.1
NetGMSK1_6B: GMSK1.6B P163.1
NetGMSK1_8C: GMSK1.8C P168.1
NetJ15_1: 
NetJ15_2: 
NetJ15_3: 
NetJ15_4: 
NetJ15_5: 
NetJ15_6: 
NetJ15_7: 
NetJ15_8: 
NetJ15_9: 
NetJ16_1: 
NetJ16_2: 
NetJ16_3: 
NetJ16_4: 
NetJ16_5: 
NetJ16_6: 
NetJ16_7: 
NetJ16_8: 
NetJ16_9: 
NetJ25_2: 
NetJ26_2: 
NetLDO1_EN1: 
NetLDO1_EN2: 
NetLDO1_EN3: 
NetLDO1_EN4: 
NetLDO1_GND: 
NetLDO1_RST1: 
NetLDO1_RST2: 
NetLDO1_RST3: 
NetLDO1_RST4: 
NetLDO2_EN1: 
NetLDO2_EN2: 
NetLDO2_EN3: 
NetLDO2_EN4: 
NetLDO2_GND: 
NetLDO2_RST1: 
NetLDO2_RST2: 
NetLDO2_RST3: 
NetLDO2_RST4: 
NetP275_2: 
NetP276_2: 
NetP297_1: 
NetP298_1: 
NetP299_1: 
NetP300_1: 
NetP358_2: 
NetP359_2: 
NetP362_2: 
NetP363_2: 
NetP365_2: 
NetP366_2: 
NetP368_2: 
NetP369_2: 
NetP372_1: 
NetP375_1: 
NetP377_1: 
NetP378_1: 
NetP380_1: 
NetP381_1: 
PLLACQ1: P160.2
PLLACQ2: P166.2
PWR_E\N\: 
RX1_AF: P121.1
RX1_GMSK: P117.1 P152.1
RX2_AF: P122.1
RX2_GMSK: P118.1 P154.1
RX_PSAVE1: P144.1
RX_PSAVE2: P149.1
RX_S/N1: P157.2
RX_S/N2: P163.2
RXACQ1: P145.1
RXACQ2: P150.1
RXCLK1: P156.2
RXCLK2: P162.2
RXDATA1: P142.1
RXDATA2: P147.1
RXHOLD1: P159.2
RXHOLD2: P165.2
S0: P125.2
S1: P126.2
S2: P127.2
S3: P128.2
S4: P129.2
S5: P130.2
S6: P131.2
S7: P132.2
SOLA_X+_T: 
SOLA_X+_V: 
SOLA_X-_T: 
SOLA_X-_V: 
SOLA_Y+_T: 
SOLA_Y+_V: 
SOLA_Y-_T: 
SOLA_Y-_V: 
SOLA_Z+_T: 
SOLA_Z+_V: 
SOLA_Z-_T: 
SOLA_Z-_V: 
TBATT: 
TELEM_E\N\: 
TX1_AF: P119.1
TX1_GMSK: P115.1 P151.1
TX2_AF: P120.1
TX2_GMSK: P116.1 P153.1
TX_PSAVE1: P158.2
TX_PSAVE2: P164.2
TXCLK1: P155.2
TXCLK2: P161.2
TXDATA1: P141.1
TXDATA2: P146.1
TXEN1: P143.1
TXEN2: P148.1
UART0_RX: 
UART0_TX: 
V_BATT: 
V_LOAD: 
VVAR_TX1: 
VVAR_TX2: 
pads on no net: GMSK1. GMSK1.3 GMSK1.4 GMSK1.11A GMSK1.GND

## Text inside footprints (layer, text, board x,y; h text height)
COMMS: Top Overlay "Communications" at 63668.03,42817.91 h150; Top Overlay "2" at 66305.2,44117.26 h50 r270; Top Overlay "1" at 66205.2,44097.26 h50 r270; Top Overlay "7" at 66205.2,43657.26 h50 r270; Top Overlay "8" at 66305.2,43657.26 h50 r270; Top Overlay "2" at 63076.3,43623.94 h50 r90; Top Overlay "1" at 63176.3,43643.94 h50 r90; Top Overlay "7" at 63176.3,44083.94 h50 r90; Top Overlay "8" at 63076.3,44083.94 h50 r90; Top Overlay "Switching Circuit" at 65016.54,44403.07 h39.37 r180; Top Overlay "S1" at 65006.69,44471.97 h39.37 r180; Top Overlay "S0" at 65105.12,44471.97 h39.37 r180; Top Overlay "TXD" at 65242.91,44471.97 h39.37 r180; Top Overlay "M0" at 65429.92,44471.97 h39.37 r180; Top Overlay "M1" at 65321.65,44471.97 h39.37 r180; Top Overlay "RXD" at 65557.87,44471.97 h39.37 r180; Top Overlay "AFSK2" at 65439.76,44403.07 h39.37 r180; Top Overlay "Q1" at 64967.32,41312.52 h39.37; Top Overlay "DTMF1" at 65144.49,41381.42 h39.37; Top Overlay "Q2" at 65055.91,41312.52 h39.37; Top Overlay "Q3" at 65154.33,41312.52 h39.37; Top Overlay "Q4" at 65252.76,41312.52 h39.37; Top Overlay "ST" at 65351.18,41312.52 h39.37; Top Overlay "ES" at 65449.61,41312.52 h39.37; Top Overlay "ES" at 64859.06,41312.52 h39.37; Top Overlay "ST" at 64760.63,41312.52 h39.37; Top Overlay "Q4" at 64662.2,41312.52 h39.37; Top Overlay "Q3" at 64563.78,41312.52 h39.37; Top Overlay "Q2" at 64465.35,41312.52 h39.37; Top Overlay "DTMF2" at 64553.94,41381.42 h39.37; Top Overlay "Q1" at 64376.77,41312.52 h39.37; Top Overlay "VCC" at 64179.92,41312.52 h39.37; Top Overlay "GND" at 63983.07,41312.52 h39.37; Top Overlay "S7" at 64425.98,44471.97 h39.37 r180; Top Overlay "S6" at 64524.41,44471.97 h39.37 r180; Top Overlay "S5" at 64612.99,44471.97 h39.37 r180; Top Overlay "S4" at 64711.42,44471.97 h39.37 r180; Top Overlay "S3" at 64809.84,44471.97 h39.37 r180; Top Overlay "S2" at 64918.11,44471.97 h39.37 r180; Top Overlay "AFSK1" at 64209.45,44403.07 h39.37 r180; Top Overlay "RXD" at 64337.4,44471.97 h39.37 r180; Top Overlay "M1" at 64091.34,44471.97 h39.37 r180; Top Overlay "M0" at 64199.61,44471.97 h39.37 r180; Top Overlay "TXD" at 64012.6,44471.97 h39.37 r180; Top Overlay "RX2" at 66050,43694.41 h39.37; Top Overlay "TX2" at 66050,43802.68 h39.37; Top Overlay "RX1" at 66059.84,43901.1 h39.37; Top Overlay "TX1" at 66050,43989.68 h39.37; Top Overlay "GMSK" at 66394.49,43960.16 h39.37 r270; Top Overlay "TX1" at 63231.1,44003.46 h39.37; Top Overlay "TX2" at 63227.17,43912.91 h39.37; Top Overlay "Radios" at 62988.98,43792.83 h39.37 r90; Top Overlay "RX2" at 63231.1,43696.38 h39.37; Top Overlay "RX1" at 63235.04,43790.87 h39.37; Bottom Overlay "Communications" at 65734.96,42817.91 h150
GMSK1: Top Overlay "PWR" at 71434.76,41243.98 h47.24; Top Overlay "GPIO2" at 71101.1,43486.1 h47.24 r180; Top Overlay "TRX" at 71046.97,42867.01 h47.24 r180; Top Overlay "BFR" at 71014.49,42598.31 h47.24 r90; Top Overlay "LP21" at 72732.4,42943.58 h47.24 r90; Top Overlay "GPIO1" at 71089.29,41483.15 h47.24 r180